# EAGLE board charging (EAGLE 6.5.0)
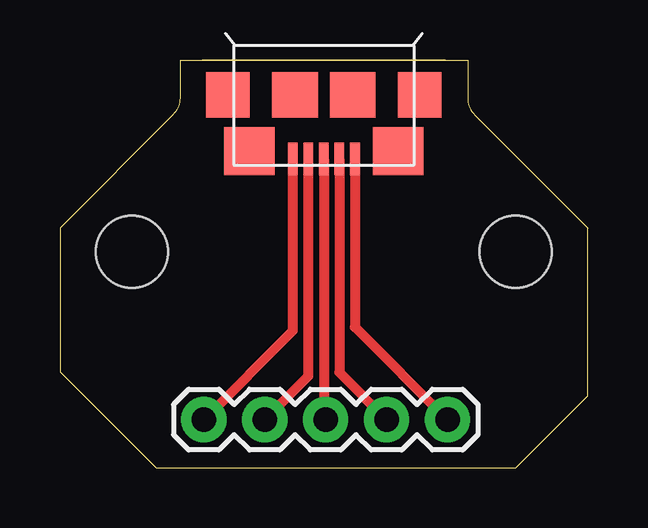
[diagram p0: board, top side]

Size 22 x 17 mm. Coordinates in mm from the lower left corner, seen from the top.
Outline: 5,17 17,17 17,15.41 arc45 17.29,14.71 22,10 22,3 19,0 4,0 0,4 0,10 4.71,14.71 arc45 5,15.41 5,17
Copper layers (1*16): Top 0.035mm / dielectric 1.5mm / Bottom 0.035mm
Design rules "default": minimum track width 10mil, minimum drill 24mil, track to track 8mil, track to pad 8mil, pad to pad 8mil, via to via 8mil, smd to smd 8mil, copper to edge 40mil, drill to drill 8mil, minimum pad ring 10mil, minimum via ring 8mil, stop-mask expansion 4mil, vias tented up to drill 0mil, thermal gap 10mil
Holes 3 mm at 19,9 3,9

## Footprints (pad centres in the part's own frame; a part is rotated, then mirrored left to right if it is on the bottom)
USB_MICRO_B-HIROSE-ZX62-B-5PA(11) = smd 0.4 x 1.35: 1 -1.3,4.125; 2 -0.65,4.125; 3 0,4.125; 4 0.65,4.125; 5 1.3,4.125 | smd 2.1 x 2: P$1 3.1,3.8; P$2 -3.1,3.8 | smd 1.8 x 1.9: P$3 -4,1.45; P$6 4,1.45 | smd 1.9 x 1.9: P$4 -1.2,1.45; P$5 1.2,1.45
1X05 = drill 1.016 pad 1.88: 1 0,0; 2 2.54,0; 3 5.08,0; 4 7.62,0; 5 10.16,0

## Placement (x,y rotation side)
J1  MICRO_USB_B_HIROSE_ZX62-B-5PA(11)  [USB_MICRO_B-HIROSE-ZX62-B-5PA(11)]  11,17 180 top
JP1  [1X05]  6,2 0 top

## Library data of the parts
J1 = connector; DIGIKEY: H11634CT-ND; MOUSER: 798-ZX62-B-5PA11; NEWARK: 86P8793
JP1 = SparkFun-Connectors

## Nets
5V: J1.1 JP1.5
D+: J1.3 JP1.3
D-: J1.2 JP1.4
GND: J1.5 JP1.1
ID: J1.4 JP1.2

## Tracks (layer width: path | path; a pad name or v marks a point on that pad's centre or on a via)
5V
  Top 0.406: J1.1 12.3,5.86 JP1.5
D+
  Top 0.406: J1.3 11,2.08 JP1.3
D-
  Top 0.406: J1.2 11.65,3.97 JP1.4
GND
  Top 0.406: J1.5 9.7,5.7 JP1.1
ID
  Top 0.406: J1.4 10.35,3.81 JP1.2

## Text on the board
tDocu: BMO CHARGER / N.Jackson / REV A / 7/16 | GND | ID | D+ | D- | 5V